# EAGLE board S7G7_footprint_simplified_w_ethernet_v1p4 (EAGLE 9.3.1)
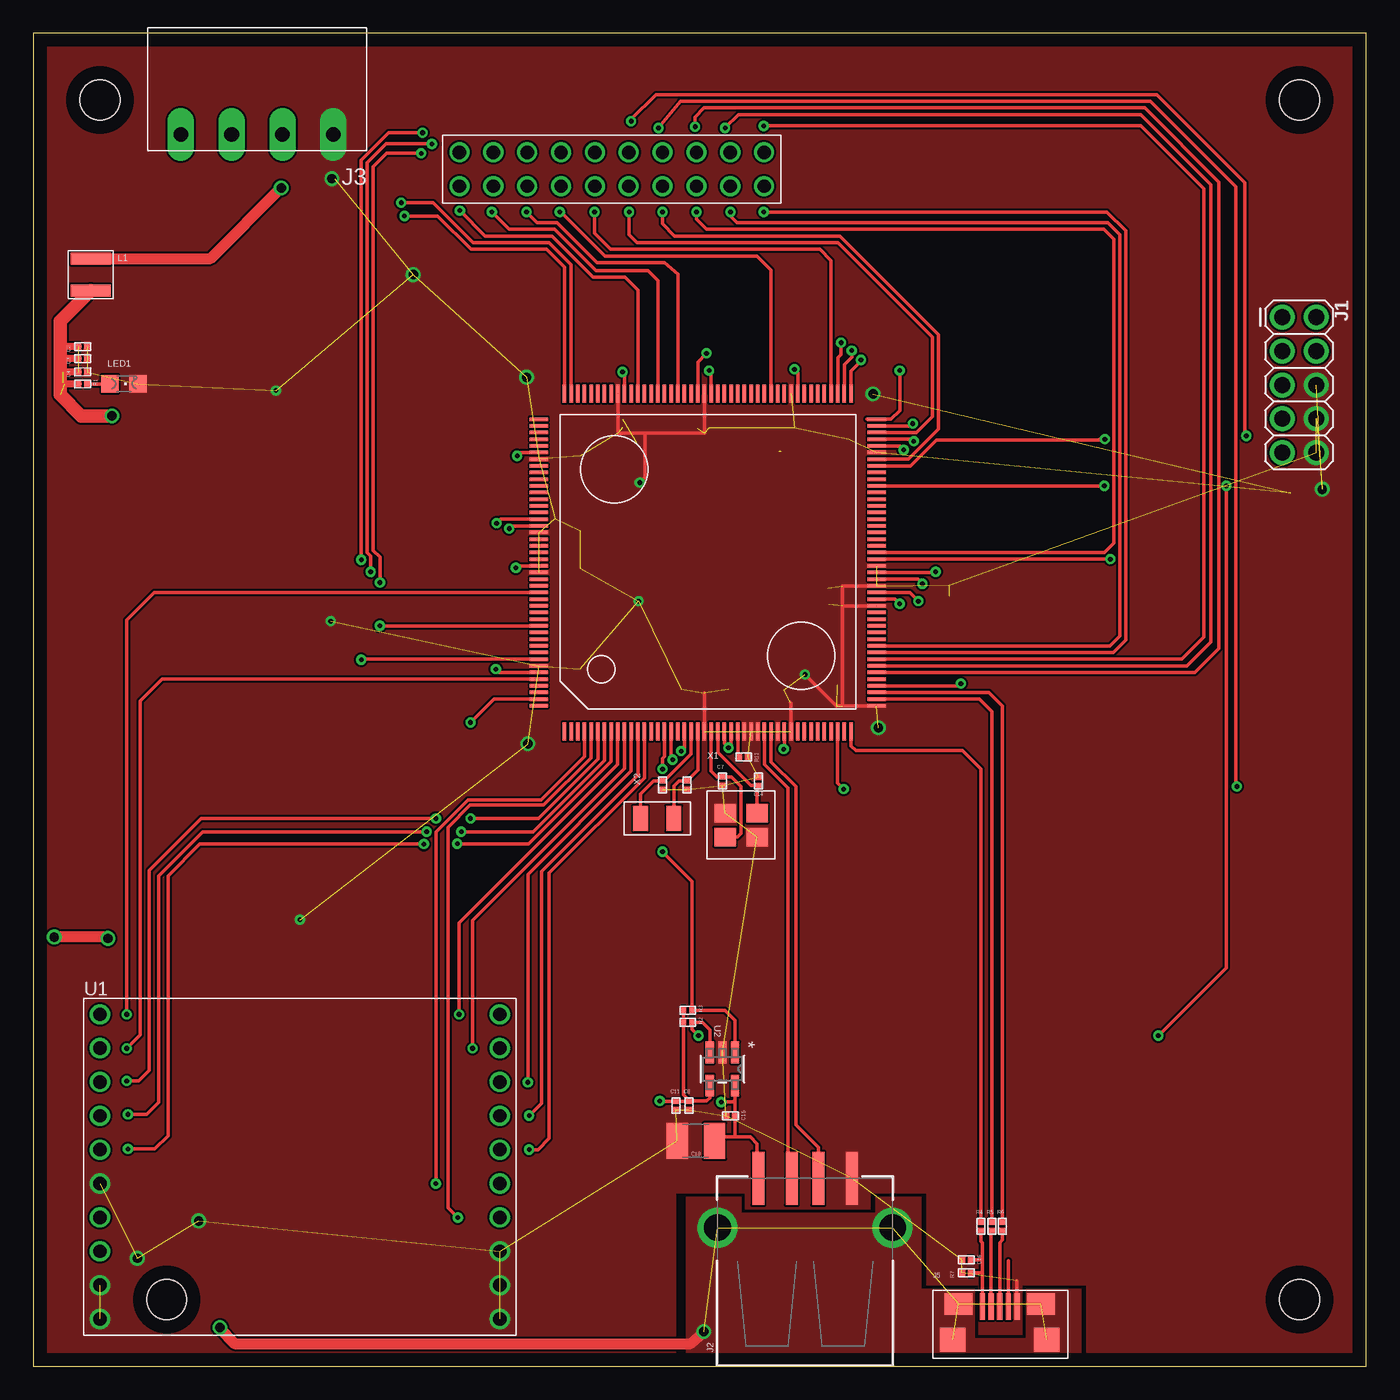
[diagram p0: board, top side]
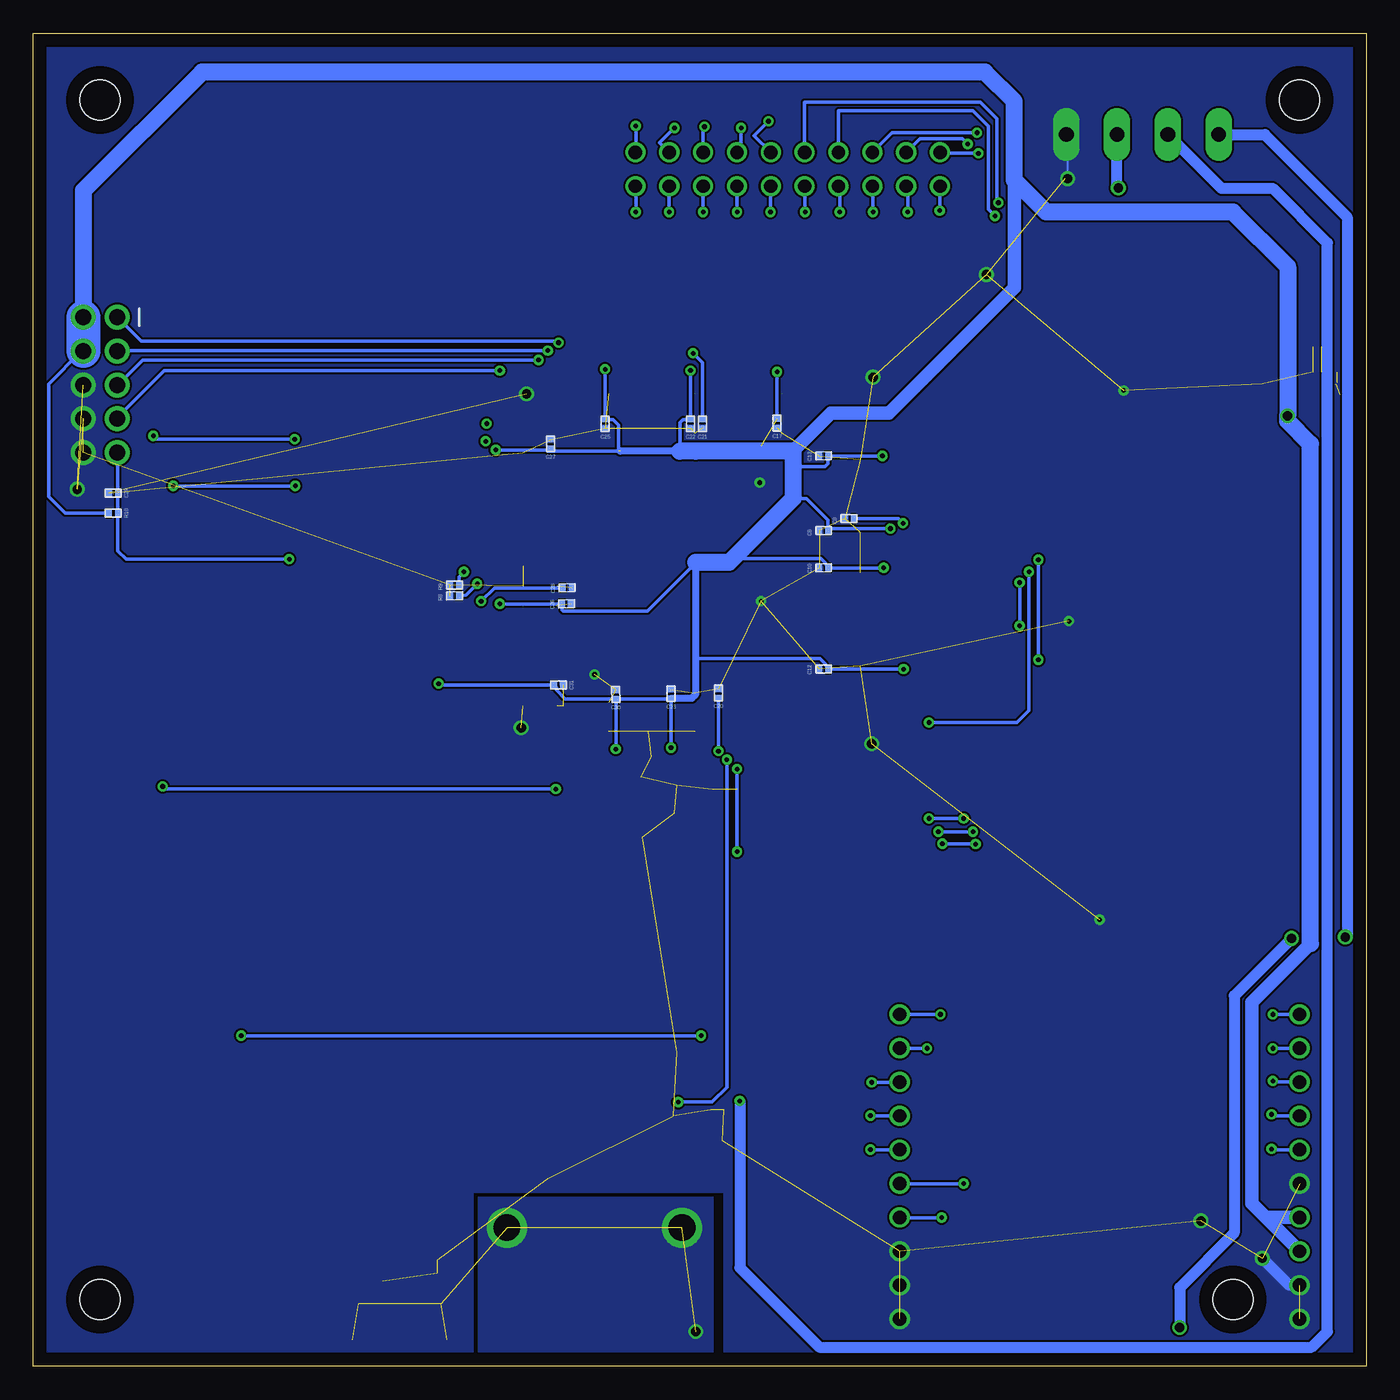
[diagram p1: board, bottom side, seen from below]

Size 100 x 100 mm. Coordinates in mm from the lower left corner, seen from the top.
Outline: 0,0 100,0 100,100 0,100 0,0
Copper layers (1*16): Top 0.035mm / dielectric 1.5mm / Bottom 0.035mm
Design rules "default": minimum track width 6mil, minimum drill 0.35mm, track to track 6mil, track to pad 6mil, pad to pad 6mil, via to via 6mil, smd to smd 6mil, copper to edge 40mil, drill to drill 6mil, minimum pad ring 10mil, minimum via ring 8mil, stop-mask expansion 4mil, vias tented up to drill 0mil, thermal gap 10mil
Holes 3 mm at 5,95 95,95 95,5 10,5

## Footprints (pad centres in the part's own frame; a part is rotated, then mirrored left to right if it is on the bottom)
0402 = smd 0.5 x 0.4: P$1 0,0.325; P$2 0,-0.325
C1210 = smd 1.6 x 2.7: 1 -1.4,0; 2 1.4,0
2X5 = drill 1.2 pad 1.88: 1 0,0; 2 0,2.54; 3 2.54,0; 4 2.54,2.54; 5 5.08,0; 6 5.08,2.54; 7 7.62,0; 8 7.62,2.54; 9 10.16,0; 10 10.16,2.54
USB_A_SMT = smd 4 x 0.9: D+ 6.7,-1; D- 6.7,1; GND 6.7,-3.5; VBUS 6.7,3.5 | drill 2: SHLD1 3,-6.566; SHLD2 3,6.566
1X4_3.81MM_PITCH = drill 1.1 pad 2 long: P$1 0,0; P$2 3.81,0; P$3 7.62,0; P$4 11.43,0
2_X_10_.1_INCH = drill 1: P$1 -11.43,-1.27; P$2 -11.43,1.27; P$3 -8.89,-1.27; P$4 -8.89,1.27; P$5 -6.35,-1.27; P$6 -6.35,1.27; P$7 -3.81,-1.27; P$8 -3.81,1.27; P$9 -1.27,-1.27; P$10 -1.27,1.27; P$11 1.27,-1.27; P$12 1.27,1.27; P$13 3.81,-1.27; P$14 3.81,1.27; P$15 6.35,-1.27; P$16 6.35,1.27; P$17 8.89,-1.27; P$18 8.89,1.27; P$19 11.43,-1.27; P$20 11.43,1.27
USB_MICRO-B = smd 0.4 x 2: P$1 -1.3,2.475; P$2 -0.65,2.475; P$3 0,2.475; P$4 0.65,2.475; P$5 1.3,2.475 | smd 2.1 x 1.6: P$6 -3.1,2.675; P$7 3.1,2.675 | smd 1.9 x 1.8: P$8 -3.525,0; P$9 3.525,0
1008_(2520_METRIC) = smd 3 x 0.9: 1 0,1.2; 2 0,-1.2
LED_0805_GREEN = smd 1.3 x 1.3: A 0,-1.05; C 0,1.05
ETHERNET_HAT = drill 1: P1 -15.3,-10.96; P2 -15.3,-8.42; P3 -15.3,-5.88; P4 -15.3,-3.34; P5 -15.3,-0.8; P6 -15.3,1.74; P7 -15.3,4.28; P8 -15.3,6.82; P9 -15.3,9.36; P10 -15.3,11.9; P11 14.7,-10.96; P12 14.7,-8.42; P13 14.7,-5.88; P14 14.7,-3.34; P15 14.7,-0.8; P16 14.7,1.74; P17 14.7,4.28; P18 14.7,6.82; P19 14.7,9.36; P20 14.7,11.9
SOT-23-5 = smd 1.626 x 0.61: 1 -1.245,0.95; 2 -1.245,0; 3 -1.245,-0.95; 4 1.245,-0.95; 5 1.245,0.95
LQFP176_24X24 = smd 1.372 x 0.254: 1 -12.675,10.75; 2 -12.675,10.25; 3 -12.675,9.75; 4 -12.675,9.25; 5 -12.675,8.75; 6 -12.675,8.25; 7 -12.675,7.75; 8 -12.675,7.25; 9 -12.675,6.75; 10 -12.675,6.25; 11 -12.675,5.75; 12 -12.675,5.25; 13 -12.675,4.75; 14 -12.675,4.25; 15 -12.675,3.75; 16 -12.675,3.25; 17 -12.675,2.75; 18 -12.675,2.25; 19 -12.675,1.75; 20 -12.675,1.25; 21 -12.675,0.75; 22 -12.675,0.25; 23 -12.675,-0.25; 24 -12.675,-0.75; 25 -12.675,-1.25; 26 -12.675,-1.75; 27 -12.675,-2.25; 28 -12.675,-2.75; 29 -12.675,-3.25; 30 -12.675,-3.75; 31 -12.675,-4.25; 32 -12.675,-4.75; 33 -12.675,-5.25; 34 -12.675,-5.75; 35 -12.675,-6.25; 36 -12.675,-6.75; 37 -12.675,-7.25; 38 -12.675,-7.75; 39 -12.675,-8.25; 40 -12.675,-8.75; 41 -12.675,-9.25; 42 -12.675,-9.75; 43 -12.675,-10.25; 44 -12.675,-10.75; 89 12.675,-10.75; 90 12.675,-10.25; 91 12.675,-9.75; 92 12.675,-9.25; 93 12.675,-8.75; 94 12.675,-8.25; 95 12.675,-7.75; 96 12.675,-7.25; 97 12.675,-6.75; 98 12.675,-6.25; 99 12.675,-5.75; 100 12.675,-5.25; 101 12.675,-4.75; 102 12.675,-4.25; 103 12.675,-3.75; 104 12.675,-3.25; 105 12.675,-2.75; 106 12.675,-2.25; 107 12.675,-1.75; 108 12.675,-1.25; 109 12.675,-0.75; 110 12.675,-0.25; 111 12.675,0.25; 112 12.675,0.75; 113 12.675,1.25; 114 12.675,1.75; 115 12.675,2.25; 116 12.675,2.75; 117 12.675,3.25; 118 12.675,3.75; 119 12.675,4.25; 120 12.675,4.75; 121 12.675,5.25; 122 12.675,5.75; 123 12.675,6.25; 124 12.675,6.75; 125 12.675,7.25; 126 12.675,7.75; 127 12.675,8.25; 128 12.675,8.75; 129 12.675,9.25; 130 12.675,9.75; 131 12.675,10.25; 132 12.675,10.75 | smd 0.254 x 1.372: 45 -10.75,-12.675; 46 -10.25,-12.675; 47 -9.75,-12.675; 48 -9.25,-12.675; 49 -8.75,-12.675; 50 -8.25,-12.675; 51 -7.75,-12.675; 52 -7.25,-12.675; 53 -6.75,-12.675; 54 -6.25,-12.675; 55 -5.75,-12.675; 56 -5.25,-12.675; 57 -4.75,-12.675; 58 -4.25,-12.675; 59 -3.75,-12.675; 60 -3.25,-12.675; 61 -2.75,-12.675; 62 -2.25,-12.675; 63 -1.75,-12.675; 64 -1.25,-12.675; 65 -0.75,-12.675; 66 -0.25,-12.675; 67 0.25,-12.675; 68 0.75,-12.675; 69 1.25,-12.675; 70 1.75,-12.675; 71 2.25,-12.675; 72 2.75,-12.675; 73 3.25,-12.675; 74 3.75,-12.675; 75 4.25,-12.675; 76 4.75,-12.675; 77 5.25,-12.675; 78 5.75,-12.675; 79 6.25,-12.675; 80 6.75,-12.675; 81 7.25,-12.675; 82 7.75,-12.675; 83 8.25,-12.675; 84 8.75,-12.675; 85 9.25,-12.675; 86 9.75,-12.675; 87 10.25,-12.675; 88 10.75,-12.675; 133 10.75,12.675; 134 10.25,12.675; 135 9.75,12.675; 136 9.25,12.675; 137 8.75,12.675; 138 8.25,12.675; 139 7.75,12.675; 140 7.25,12.675; 141 6.75,12.675; 142 6.25,12.675; 143 5.75,12.675; 144 5.25,12.675; 145 4.75,12.675; 146 4.25,12.675; 147 3.75,12.675; 148 3.25,12.675; 149 2.75,12.675; 150 2.25,12.675; 151 1.75,12.675; 152 1.25,12.675; 153 0.75,12.675; 154 0.25,12.675; 155 -0.25,12.675; 156 -0.75,12.675; 157 -1.25,12.675; 158 -1.75,12.675; 159 -2.25,12.675; 160 -2.75,12.675; 161 -3.25,12.675; 162 -3.75,12.675; 163 -4.25,12.675; 164 -4.75,12.675; 165 -5.25,12.675; 166 -5.75,12.675; 167 -6.25,12.675; 168 -6.75,12.675; 169 -7.25,12.675; 170 -7.75,12.675; 171 -8.25,12.675; 172 -8.75,12.675; 173 -9.25,12.675; 174 -9.75,12.675; 175 -10.25,12.675; 176 -10.75,12.675
SMD_3225 = smd 1.6 x 1.4: 1 -1.2,-0.9; 2 1.2,-0.9; 3 1.2,0.9; 4 -1.2,0.9
SMD_X_2_PADS = smd 1.9 x 1.1: P$1 0,1.25; P$2 0,-1.25

## Placement (x,y rotation side)
C2  0.1uF  [0402]  3.7,76.5 90 top
C3  10uF  [0402]  3.7,75.6 90 top
C4  0.1uF  [0402]  3.7,74.6 90 top
C6  0.1uF  [0402]  40.7,62.7 90 bottom
C7  18pF  [0402]  51.7,43.9 0 top
C8  10uF  [0402]  49.2,19.55 0 top
C9  0.1uF  [0402]  38.8,63.6 90 bottom
C10  0.1uF  [0402]  40.7,59.9 90 bottom
C11  0.1uF  [0402]  48.2,19.55 0 top
C12  0.1uF  [0402]  40.7,52.3 90 bottom
C13  0.1uF  [0402]  40.7,68.3 90 bottom
C14  18pF  [0402]  54.4,43.9 180 top
C15  0.1uF  [0402]  52.3,18.8 270 top
C16  1uF  [0402]  70,8 270 top
C17  0.1uF  [0402]  44.2,70.75 180 bottom
C18  100uF  [C1210]  49.7,16.9 180 top
C19  12pF  [0402]  47.2,43.6 0 top
C20  0.1uF  [0402]  48.6,50.5 180 bottom
C21  0.1uF  [0402]  49.8,70.7 180 bottom
C22  0.1uF  [0402]  50.7,70.7 180 bottom
C23  0.1uF  [0402]  52.15,50.45 180 bottom
C24  12pF  [0402]  49.05,43.6 0 top
C25  0.1uF  [0402]  57.1,70.7 180 bottom
C26  0.1uF  [0402]  60,57.2 90 bottom
C27  1uF  [0402]  61.2,69.2 180 bottom
C28  0.1uF  [0402]  59.95,58.4 90 bottom
C29  10uF  [0402]  94,65.5 270 bottom
C30  0.1uF  [0402]  56.3,50.4 180 bottom
C31  0.1uF  [0402]  60.6,51.1 270 bottom
J1  [2X5]  93.7,78.7 270 top
J2  [USB_A_SMT]  57.9,7.4 90 top
J3  [1X4_3.81MM_PITCH]  22.5,92.4 180 top
J4  2_X_10_HEADER_GENERIC  [2_X_10_.1_INCH]  43.4,89.8 0 top
J5  [USB_MICRO-B]  72.5,2 0 top
L1  2.2uH  [1008_(2520_METRIC)]  4.3,81.9 0 top
LED1  LED_0805_GREEN  [LED_0805_GREEN]  6.8,73.7 270 top
R1  470R  [0402]  3.7,73.7 270 top
R2  10K0  [0402]  49.1,25.8 270 top
R3  10K0  [0402]  49.1,26.7 270 top
R4  15K0  [0402]  71.1,10.5 0 top
R5  27R0  [0402]  71.9,10.5 0 top
R6  27R0  [0402]  72.7,10.5 0 top
R7  30K0  [0402]  70,7 90 top
R8  10K  [0402]  68.4,57.8 90 bottom
R9  10K  [0402]  68.4,58.6 90 bottom
R10  10K  [0402]  94,64 270 bottom
R11  2.2K  [0402]  53.3,45.7 270 top
U1  ETHERNET_HAT  [ETHERNET_HAT]  20.3,14.5 0 top
U2  AP2141DWG-5  [SOT-23-5]  51.7,22.3 270 top
U5  [LQFP176_24X24]  50.6,60.3 90 top
X1  24MHZ  [SMD_3225]  53.1,40.6 0 top
X2  32.768KHZ  [SMD_X_2_PADS]  46.8,41.1 90 top

## Library data of the parts
C2-C4 C6-C31 J2-J5 L1 LED1 R1-R11 U1 U2 U5 X1 X2 = 3D_MIG_Controller
J1 = 3D_MIG_Controller; PROD_ID: CONN-08499; SF_ID: PRT-0778

## Nets
D+: J5.P$3 R6.P$2
D-: J5.P$2 R5.P$2
ETH: U1.P20 U5.9
ETH_CRS_DV: U1.P16 U5.13
ETH_IRQ14: U1.P10 U5.159
ETH_MDC: U1.P15 U5.4
ETH_MDIO: U1.P14 U5.5
ETH_RESET: U1.P9 U5.172
ETH_RX_ER: U1.P17 U5.12
ETH_RXD0: U1.P19 U5.10
ETH_RXD1: U1.P18 U5.11
ETH_TXD0: U1.P6 U5.8
ETH_TXD1: U1.P7 U5.7
ETH_TXD_EN: U1.P8 U5.6
GND: C2.P$2 C3.P$2 C4.P$2 C6.P$1 C7.P$2 C8.P$2 C9.P$1 C10.P$1 C11.P$2 C12.P$1 C13.P$1 C14.P$2 C15.P$2 C16.P$2 C17.P$1 C18.2 C19.P$2 C20.P$2 C21.P$1 C22.P$1 C23.P$2 C24.P$2 C25.P$1 C26.P$2 C27.P$2 C28.P$2 C29.P$2 C30.P$2 C31.P$1 J1.6 J1.8 J1.10 J2.GND J3.P$1 J5.P$5 LED1.C R7.P$1 R8.P$1 R9.P$1 R11.P$1 U1.P1 U1.P2 U1.P5 U1.P11 U1.P12 U1.P13 U2.2 U5.22 U5.28 U5.29 U5.30 U5.33 U5.35 U5.45 U5.60 U5.63 U5.66 U5.83 U5.98 U5.111 U5.124 U5.139 U5.150 U5.156 U5.170 X1.2 X1.4
GNDE: J2.SHLD1 J2.SHLD2 J3.P$4 J5.P$6 J5.P$7 J5.P$8 J5.P$9
ID: J5.P$4
IIC_SCL: J4.P$18 U5.51
IIC_SDA: J4.P$16 U5.50
LS_4: J4.P$8 U5.132
LS_5: J4.P$10 U5.131
LS_6: J4.P$12 U5.81
M4_DIR: J4.P$7 U5.101
M4_STEP: J4.P$14 U5.42
N$1: U5.85
N$2: R11.P$2 U5.27
N$3: U5.87
N$7: LED1.A R1.P$1
N$9: C9.P$2 U5.148
N$14: C20.P$1 U5.19
N$17: C28.P$1 U5.62
N$18: R8.P$2 U5.64
N$19: R9.P$2 U5.65
P706: U5.14
RELAY_1: J4.P$15 U5.68
RELAY_2: J4.P$17 U5.54
RELAY_3: J4.P$19 U5.53
RELAY_4: J4.P$20 U5.52
RESET: C29.P$1 J1.9 R10.P$1 U5.67
TCK: J1.7 U5.88
TDI: J1.1 U5.91
TDO: J1.3 U5.90
TMS: J1.5 U5.89
USB_N: R5.P$1 U5.46
USB_P: R6.P$1 U5.47
USB_VBUS_B: R4.P$1 U5.44
USBHS_FAULT: R2.P$1 U2.3 U5.78
USBHS_N: J2.D- U5.31
USBHS_P: J2.D+ U5.32
USBHS_VBUS: C15.P$1 C18.1 J2.VBUS U2.5 U5.17
USBHS_VBUSEN: R3.P$1 U2.1 U5.16
VBUS: C16.P$1 J5.P$1 R4.P$2 R7.P$2
VCL_F(FLASH): C21.P$2 U5.112
VDD: C2.P$1 C3.P$1 C4.P$1 C6.P$2 C10.P$2 C12.P$2 C13.P$2 C17.P$2 C22.P$2 C23.P$1 C25.P$2 C26.P$1 C27.P$1 C30.P$1 C31.P$2 J1.2 J1.4 L1.2 R1.P$2 R10.P$2 U1.P3 U1.P4 U5.25 U5.26 U5.34 U5.48 U5.61 U5.84 U5.97 U5.110 U5.123 U5.138 U5.149 U5.155 U5.171
VDD5: C8.P$1 C11.P$1 J3.P$3 R2.P$2 R3.P$2 U2.4
VDDIN: J3.P$2 L1.1
X_DIR: J4.P$3 U5.118
X_LS: J4.P$2 U5.164
X_STEP: J4.P$11 U5.86
XCIN: C19.P$1 U5.20 X2.P$1
XCOUT: C24.P$1 U5.21 X2.P$2
XTAL1: C7.P$1 U5.23 X1.1
XTAL2: C14.P$1 U5.24 X1.3
Y_DIR: J4.P$5 U5.115
Y_LS: J4.P$4 U5.175
Y_STEP: J4.P$13 U5.82
Z_DIR: J4.P$1 U5.121
Z_LS: J4.P$6 U5.169
Z_STEP: J4.P$9 U5.92

## Tracks (layer width: path | path; a pad name or v marks a point on that pad's centre or on a via)
D+
  Top 0.254: R6.P$2 72.7,9.47 72.5,9.28 J5.P$3
D-
  Top 0.254: R5.P$2 71.85,10.12 J5.P$2
ETH  (via drill 0.35)
  Top 0.254: U5.9 43.85,45.15 31.94,33.24 v31.94,26.4
  Bottom 0.254: v31.94,26.4 U1.P20
ETH_CRS_DV  (via drill 0.35)
  Top 0.254: U5.13 45.85,44.15 38.7,37 38.7,17.1 37.85,16.25 v37.2,16.25
  Bottom 0.254: v37.2,16.25 U1.P16
ETH_IRQ14  (via drill 0.35)
  Top 0.254: v7,26.4 7,56 9.05,58.05 U5.159
  Bottom 0.254: U1.P10 v7,26.4
ETH_MDC  (via drill 0.35)
  Top 0.254: U5.4 41.35,45.75 38.1,42.5 32.6,42.5 30.2,40.1 v30.2,13.7
  Bottom 0.254: v30.2,13.7 U1.P15
ETH_MDIO  (via drill 0.35)
  Top 0.254: U5.5 41.85,45.65 38.29,42.09 32.77,42.09 31.11,40.43 31.11,11.89 v31.85,11.15
  Bottom 0.254: v31.85,11.15 U1.P14
ETH_RESET  (via drill 0.35)
  Top 0.254: v7,23.85 8,24.85 8,49.9 9.65,51.55 U5.172
  Bottom 0.254: v7,23.85 U1.P9
ETH_RX_ER  (via drill 0.35)
  Top 0.254: U5.12 45.35,44.35 38.13,37.13 38.13,19.73 v37.2,18.8
  Bottom 0.254: v37.2,18.8 35.02,18.8 U1.P17
ETH_RXD0  (via drill 0.35)
  Top 0.254: U5.10 44.35,44.85 32.95,33.45 v32.95,23.85
  Bottom 0.254: v32.95,23.85 U1.P19
ETH_RXD1  (via drill 0.35)
  Top 0.254: U5.11 44.85,44.65 37.1,36.9 v37.1,21.3
  Bottom 0.254: v37.1,21.3 35.02,21.3 U1.P18
ETH_TXD0  (via drill 0.35)
  Top 0.254: U5.8 43.35,45.38 37.17,39.2 v31.8,39.2 | v29.3,39.17 12.47,39.17 10.1,36.8 10.1,17.3 9.1,16.3 v7.1,16.3
  Bottom 0.254: U1.P6 7.04,16.24 v7.1,16.3 | v31.8,39.2 29.33,39.2 v29.3,39.17
ETH_TXD1  (via drill 0.35)
  Top 0.254: U5.7 42.85,45.45 37.5,40.1 v32.1,40.1 | v29.5,40.1 12.7,40.1 9.4,36.8 9.4,19.8 8.5,18.9 v7.1,18.9
  Bottom 0.254: U1.P7 6.98,18.78 v7.1,18.9 | v32.1,40.1 v29.5,40.1
ETH_TXD_EN  (via drill 0.35)
  Top 0.254: U5.6 42.35,45.55 37.9,41.1 v32.8,41.1 | v30.2,41.1 12.6,41.1 8.7,37.2 8.7,22.2 7.9,21.4 v7,21.4
  Bottom 0.254: U1.P8 6.92,21.32 v7,21.4 | v32.8,41.1 v30.2,41.1
GND  (via drill 0.35, 0.7)  (82 unrouted)
  Top 0.152: 22.6,89.1 v22.4,89.1
  Top 0.254: U5.124 43.85,70 45.9,70 | U5.111 50.35,70 45.9,70 | U5.22 50.35,50.5 | 60.7,57.05 U5.60 | 60.7,49.55 60.7,57.05 | U5.63 60.7,58.55 60.7,57.05 | U5.35 56.85,49.75 56.8,49.8 | J5.P$5 73.8,6.4 | U5.45 60.25,49.55 v57.9,51.9 | 45.9,70 45.9,66.7 v45.5,66.3 | 45.5,57.5 v45.4,57.4
  Bottom 0.152: v22.4,89.1 22.4,92.3 J3.P$1
  Bottom 0.813: U1.P2 5.78,6.08 v7.8,8.1
  other vias: 63.4,47.9 28.5,81.9 63,72.95 37.1,46.7 37,74.2 22.3,55.9 96.7,65.8 20,33.5 18.2,73.2 12.4,10.9
  pour Top: 41.9,49.5 39.9,51.5 39.8,51.5 39.8,70.7 39.9,70.8 61.2,70.8 61.2,49.5
  pour Bottom (no thermals): 48.2,0 48.2,13 67,13 67,0 100,0 100,100 0,100 0,0
  pour Top (no thermals): 48.2,13 53.4,13 53.4,11.8 62.8,11.8 62.8,13 67,13 67,6.1 70.9,6.1 70.9,2.4 74.2,2.4 74.2,6.1 79,6.1 79,0 100,0 100,100 0,100 0,0 48.2,0
GNDE  (via drill 0.7)  (6 unrouted)
  Top 0.813: v50.3,2.6 49.29,1.7 15.1,1.7 14,2.8 v14,2.9 | v5.6,32.1 5.5,32.2 v1.57,32.2
  Bottom 0.813: J3.P$4 7.6,92.4 1.42,86.22 1.42,32.2 v1.57,32.2 | v5.6,32.1 9.9,27.8 9.9,10 14,5.9 v14,2.9
  pour Bottom (no thermals): 49,12.7 49,0 66.6,0 66.6,12.7
  pour Top (no thermals): 53.1,12.7 53.1,11.5 63.2,11.5 63.2,12.7 66.6,12.7 66.6,5.8 70.6,5.8 70.6,2.1 74.5,2.1 74.5,5.8 78.6,5.8 78.6,0 49,0 49,12.7
ID
  Top 0.254: J5.P$4 73.15,7.9
IIC_SCL  (via drill 0.35)
  Top 0.254: U5.51 86.55,52.55 88.35,54.35 88.35,88.65 83.1,93.9 52.9,93.9 v51.9,92.9
  Bottom 0.254: v51.9,92.9 53.01,91.79 J4.P$18
IIC_SDA  (via drill 0.35)
  Top 0.254: U5.50 87.15,52.05 88.95,53.85 88.95,88.85 83.4,94.4 50.34,94.4 49.65,93.71 v49.65,93
  Bottom 0.254: J4.P$16 49.75,92.9 v49.65,93
LS_4  (via drill 0.35)
  Top 0.254: U5.132 39.85,82.45 38.5,83.8 32.84,83.8 30.34,86.3 v27.84,86.3
  Bottom 0.254: v27.84,86.3 28.34,86.8 28.34,93.04 29.5,94.2 39.59,94.2 J4.P$8
LS_5  (via drill 0.35)
  Top 0.254: U5.131 40.35,82.65 38.7,84.3 33,84.3 30,87.3 v27.6,87.3
  Bottom 0.254: v27.6,87.3 27.7,87.4 27.7,93.6 28.95,94.85 42.13,94.85 J4.P$10
LS_6  (via drill 0.35)
  Top 0.254: U5.81 65.8,67.55 67.74,69.49 79.97,69.49 80.03,69.55 v80.39,69.55 | v91,69.8 90.9,69.9 90.9,88.8 84.3,95.4 46.7,95.4 44.85,93.55 v44.85,93.4
  Bottom 0.254: v91,69.8 90.75,69.55 v80.39,69.55 | v44.85,93.4 45.92,92.33 J4.P$12
M4_DIR  (via drill 0.35)
  Top 0.254: U5.101 55.35,82.25 54.3,83.3 42.9,83.3 39.6,86.6 v39.5,86.6
  Bottom 0.254: J4.P$7 39.5,88.44 v39.5,86.6
M4_STEP  (via drill 0.35)
  Top 0.254: U5.42 60.35,43.75 v60.8,43.3 | v46.9,92.9 48.57,94.9 83.8,94.9 90.2,88.5 90.2,43.6 v90.3,43.5
  Bottom 0.254: v90.3,43.5 90.1,43.3 v60.8,43.3 | v46.9,92.9 46.9,91.6 47.32,91.18 J4.P$14
N$1  (via drill 0.35)
  Top 0.254: U5.85 65.91,69.55 v66.06,69.39
N$2
  Top 0.254: U5.27 52.85,45.83 R11.P$2
N$3  (via drill 0.35)
  Top 0.254: U5.87 65.82,70.55 v65.98,70.72
N$7
  Top 0.254: R1.P$1 LED1.A
N$9  (via drill 0.35)
  Top 0.254: U5.148 35.05,63.55 v34.75,63.25
  Bottom 0.254: C9.P$2 35.1,63.6 v34.75,63.25
N$14  (via drill 0.35)
  Top 0.254: U5.19 48.85,46.4 v48.6,46.15
  Bottom 0.254: v48.6,46.15 C20.P$1
N$17  (via drill 0.35)
  Top 0.254: U5.62 65.75,58.05 v66.4,57.4
  Bottom 0.254: v66.4,57.4 65.4,58.4 C28.P$1
N$18  (via drill 0.35)
  Top 0.254: U5.64 66.35,59.05 v66.7,58.7
  Bottom 0.254: v66.7,58.7 67.55,57.85 R8.P$2
N$19  (via drill 0.35)
  Top 0.254: U5.65 67.7,59.55 v67.7,59.6
  Bottom 0.254: v67.7,59.6 68.08,59.23 R9.P$2
RELAY_1  (via drill 0.35)
  Top 0.254: v49.75,86.6 49.75,86.05 50.5,85.3 80.3,85.3 81.05,84.55 81.05,61.75 80.35,61.05 U5.68
  Bottom 0.254: J4.P$15 v49.75,86.6
RELAY_2  (via drill 0.35)
  Top 0.254: U5.54 80.75,54.05 81.5,54.8 81.5,84.9 80.6,85.8 52.8,85.8 52.3,86.3 v52.3,86.6
  Bottom 0.254: v52.3,86.6 J4.P$17
RELAY_3  (via drill 0.35)
  Top 0.254: U5.53 81.02,53.54 81.95,54.48 81.95,85.2 80.55,86.6 v54.8,86.6
  Bottom 0.254: v54.8,86.6 54.8,88.5 J4.P$19
RELAY_4  (via drill 0.35)
  Top 0.254: U5.52 86.15,53.05 87.8,54.7 87.8,88.35 83.08,93.08 54.83,93.08 v54.8,93.05
  Bottom 0.254: v54.8,93.05 54.8,91.1 J4.P$20
RESET  (via drill 0.35)
  Top 0.254: U5.67 v80.8,60.55
  Bottom 0.254: v80.8,60.55 93.05,60.55 93.67,61.17 R10.P$1 C29.P$1 93.67,68.52 J1.9
TCK  (via drill 0.35)
  Top 0.254: 62.55,71.05 U5.88 64.35,71.05 65,71.7 v65,74.7
  Bottom 0.254: J1.7 93.7,71.18 90.18,74.7 v65,74.7
TDI  (via drill 0.35)
  Top 0.254: v60.6,76.8 60.6,75.9 60.35,75.65 U5.91
  Bottom 0.254: J1.1 91.9,76.9 60.7,76.9 v60.6,76.8
TDO  (via drill 0.35)
  Top 0.254: U5.90 60.85,75.15 61.4,75.7 v61.4,76.2
  Bottom 0.254: J1.3 93.6,76.2 v61.4,76.2
TMS  (via drill 0.35)
  Top 0.254: v62.1,75.5 62.1,75.42 61.35,74.67 U5.89
  Bottom 0.254: J1.5 93.68,73.62 91.8,75.5 v62.1,75.5
USB_N
  Top 0.254: U5.46 70.97,50.05 71.9,49.12 R5.P$1
USB_P
  Top 0.254: U5.47 71.7,50.55 72.7,49.55 72.7,48.5 R6.P$1 72.8,10.93
USB_VBUS_B
  Top 0.254: R4.P$1 71.1,44.8 69.7,46.2 61.7,46.2 61.35,46.55 U5.44
USBHS_FAULT  (via drill 0.35)
  Top 0.254: v80.35,66.05 U5.78 | v89.5,66.05 89.5,29.9 v84.4,24.8 | U2.3 50.75,25.25 50.2,25.8 R2.P$1 49.42,25.27 v49.9,24.8
  Bottom 0.254: v89.5,66.05 v80.35,66.05 | v84.4,24.8 v49.9,24.8
USBHS_N
  Top 0.152: 56.6,14.91 J2.D-
  Top 0.254: U5.31 54.85,45.15 56.6,43.4 56.6,14.91
USBHS_P
  Top 0.254: U5.32 55.35,45.35 57.2,43.5 57.2,18.11 58.9,16.41 J2.D+
USBHS_VBUS  (via drill 0.35)
  Top 0.254: U5.17 47.85,45.62 v47.97,45.5 | U2.5 52.65,20 | 52.65,20 52.65,19.37 52.65,18.83 C15.P$1 52.62,17.2 | 52.62,17.2 51.4,17.2 C18.1 | 54.4,15.05 J2.VBUS 54.3,14.71 54.3,16.7 53.8,17.2 52.62,17.2 | v51.62,19.82 52.47,19.82 52.65,20
  Bottom 0.254: v47.97,45.5 47.97,20.93 49.09,19.82 v51.62,19.82
USBHS_VBUSEN  (via drill 0.35)
  Top 0.254: v47.2,44.8 47.2,45.6 47.35,45.75 U5.16 | U2.1 52.65,25.95 51.9,26.7 R3.P$1 49.42,36.38 v47.2,38.6
  Bottom 0.254: v47.2,44.8 v47.2,38.6
VBUS
  Top 0.254: J5.P$1 71.2,7 | 71.2,7 71.2,8 | R4.P$2 71.1,9.38 71.2,9.28 71.2,8 | R7.P$2 71.2,7 | C16.P$1 71.2,8
VCL_F(FLASH)  (via drill 0.35)
  Top 0.254: U5.112 49.85,75.35 v50.5,76
  Bottom 0.254: C21.P$2 49.8,75.3 v50.5,76
VDD  (via drill 0.35, 0.7)  (6 unrouted)
  Top 0.254: U5.97 57.35,74.55 v57.1,74.8 | U5.110 50.85,74.55 v50.7,74.7 | U5.149 35.9,63.05 v35.7,62.85 | U5.138 36.55,68.55 v36.3,68.3 | U5.171 34.95,52.05 v34.7,52.3 | U5.155 36.35,60.05 v36.2,59.9 | U5.25 51.85,46.71 v52.16,46.4 52.35,46.59 U5.26 | U5.61 64.65,57.55 v65,57.2 | U5.123 44.35,74.45 v44.2,74.6 | U5.84 65,69.05 v65.3,68.75 | U5.34 56.35,46.35 v56.3,46.3 | U5.48 69.44,51.05 v69.6,51.21
  Top 0.508: R1.P$2 2.3,73.7 2.2,73.8 | C4.P$1 2.2,74.6 | C3.P$1 2.2,75.6 | C2.P$1 2,76.5
  Top 1.016: L1.2 2,78.4 2,72.9 3.6,71.3 v5.9,71.3
  Bottom 0.254: v35.7,62.85 40.23,62.85 C6.P$2 40.38,63.48 42,65.1 43,65.1 | v36.2,59.9 C10.P$2 40.58,60.27 40.9,60.6 47.5,60.6 47.8,60.3 | v65,57.2 C26.P$1 60.33,56.73 60.27,56.67 53.93,56.67 50.3,60.3 | v65.3,68.75 61.33,68.75 C27.P$1 61.42,68.65 56.1,68.65 56.1,70.6 56.52,71.03 C25.P$2 v57.1,74.8 | v34.7,52.3 C12.P$2 40.62,52.73 41,53.1 50.3,53.1 | v52.16,46.4 C23.P$1 52.2,50.08 C30.P$1 | v36.3,68.3 C13.P$2 40.38,67.72 40.6,67.5 43,67.5 | C17.P$2 v44.2,74.6 | v50.7,74.7 C22.P$2 51.27,71.03 51.5,70.8 51.5,68.65 | v56.3,46.3 C30.P$1 | v69.6,51.21 69.49,51.1 C31.P$2 60.75,50.93 60.75,50.73 60.09,50.08 C30.P$1 | R10.P$2 97.62,64 98.86,65.23 98.86,73.7 96.4,76.16 J1.4
  Bottom 0.508: 43,68.65 45,68.65 | 45,68.65 50.3,68.65 | 45.4,69.05 45,68.65 | 50.3,60.3 50.3,53.1 50.3,50.4 50.58,50.12 C23.P$1 | 51.5,68.65 55.95,68.65
  Bottom 1.016: 4.19,31.69 8.59,27.29 8.59,12.21 U1.P3 7.54,11.16 U1.P4 | 43,68.65 40.15,71.5 35.8,71.5 26.4,80.9 26.4,89
  Bottom 1.27: 4.19,31.69 4.19,69.2 5.9,70.91 v5.9,71.3 5.9,82.5 10,86.6 24,86.6 26.4,89 26.4,94.9 28.6,97.1 87.34,97.1 96.24,88.2 J1.2 | 51.5,68.65 50.3,68.65 43,68.65 43,67.5 43,65.1 47.8,60.3 50.3,60.3
  Bottom 2.54: J1.2 J1.4
VDD5  (via drill 0.35)
  Top 0.254: U2.4 50.75,20.15 50.5,19.9 49.23,19.9 | 49.23,19.9 C8.P$1 C11.P$1 47.02,19.88 v47,19.9 | R3.P$2 R2.P$2 48.77,20.35 49.23,19.9
  Bottom 0.813: v47,19.9 47,7.4 41.02,1.42 4.09,1.42 2.91,2.6 2.91,84.27 7.02,88.38 10.86,88.38 J3.P$3
VDDIN  (via drill 0.7)
  Top 0.813: v18.6,88.4 13.3,83.1 L1.1
  Bottom 0.813: v18.6,88.4 18.69,88.49 J3.P$2
X_DIR  (via drill 0.35)
  Top 0.254: U5.118 46.85,81.45 46.1,82.2 42.2,82.2 39.1,85.3 35.7,85.3 v34.4,86.6
  Bottom 0.254: J4.P$3 34.44,88.46 34.5,88.4 34.4,88.3 v34.4,86.6
X_LS  (via drill 0.35)
  Top 0.254: U5.164 v26,55.55 | v26,58.8 26,60.7 25.5,61.2 25.5,90 26.5,91 v29.1,91
  Bottom 0.254: v26,58.8 v26,55.55 | v29.1,91 31.9,91 J4.P$2
X_STEP  (via drill 0.35)
  Top 0.254: U5.86 66.25,70.05 67.45,71.25 67.45,77.2 60.35,84.3 45.3,84.3 44.7,84.9 v44.7,86.6
  Bottom 0.254: v44.7,86.6 44.7,88.5 J4.P$11
XCIN
  Top 0.152: 45.55,41.4 X2.P$1
  Top 0.2: 45.55,41.7 45.55,41.4
  Top 0.254: X2.P$1 45.6,41.05 | 49.33,47.61 U5.20 49.35,45.95 47.33,43.92 C19.P$1 46.52,43.92 45.55,42.95 45.55,41.7
XCOUT
  Top 0.2: 48.05,41.5 X2.P$2
  Top 0.254: X2.P$2 47.75,41.4 | U5.21 49.85,44.73 C24.P$1 48.42,43.92 48.05,43.55 48.05,41.5
XTAL1
  Top 0.152: 52,39.7 X1.1
  Top 0.254: 51.6,39.7 X1.1 | 52,39.7 52.82,39.7 53.1,39.98 53.1,43.5 52.38,44.23 C7.P$1 51.27,44.23 50.85,44.65 U5.23
XTAL2
  Top 0.2: 54.3,41.6 X1.3
  Top 0.254: 54.4,41.7 54.3,41.6 54.3,43.48 C14.P$1 53.83,43.58 51.35,46.05 U5.24
Y_DIR  (via drill 0.35)
  Top 0.254: U5.115 48.35,81.92 47.35,82.8 42.3,82.8 39.3,85.8 37.8,85.8 v37,86.6
  Bottom 0.254: J4.P$5 37,88.48 v37,86.6
Y_LS  (via drill 0.35)
  Top 0.254: U5.175 34.55,50.05 v32.8,48.3 | v25.3,59.6 25.3,60.8 25.05,61.05 25.05,90.3 26.45,91.7 v29.9,91.7
  Bottom 0.254: v32.8,48.3 26.2,48.3 25.3,49.2 v25.3,59.6 | v29.9,91.7 30.3,92.1 33.48,92.1 J4.P$4
Y_STEP  (via drill 0.35)
  Top 0.254: U5.82 65.65,68.05 67.9,70.3 67.9,77.4 60.5,84.8 48.1,84.8 47.2,85.7 v47.2,86.6
  Bottom 0.254: J4.P$13 v47.2,86.6
Z_DIR  (via drill 0.35)
  Top 0.254: U5.121 45.35,80.75 44.4,81.7 42,81.7 38.9,84.8 33.9,84.8 v32,86.7
  Bottom 0.254: J4.P$1 31.97,86.73 v32,86.7
Z_LS  (via drill 0.35)
  Top 0.254: v24.6,60.5 24.6,90.5 26.65,92.55 v29.2,92.55 | U5.169 24.65,53.05 v24.6,53
  Bottom 0.254: v24.6,60.5 v24.6,53 | J4.P$6 35.57,92.55 v29.2,92.55
Z_STEP  (via drill 0.35)
  Top 0.254: U5.92 59.85,82.95 59,83.8 43.3,83.8 42.1,85 v42.1,86.6
  Bottom 0.254: J4.P$9 42.1,88.5 v42.1,86.6